# EAGLE board RFM69Pi_V3 (EAGLE 7.2.0)
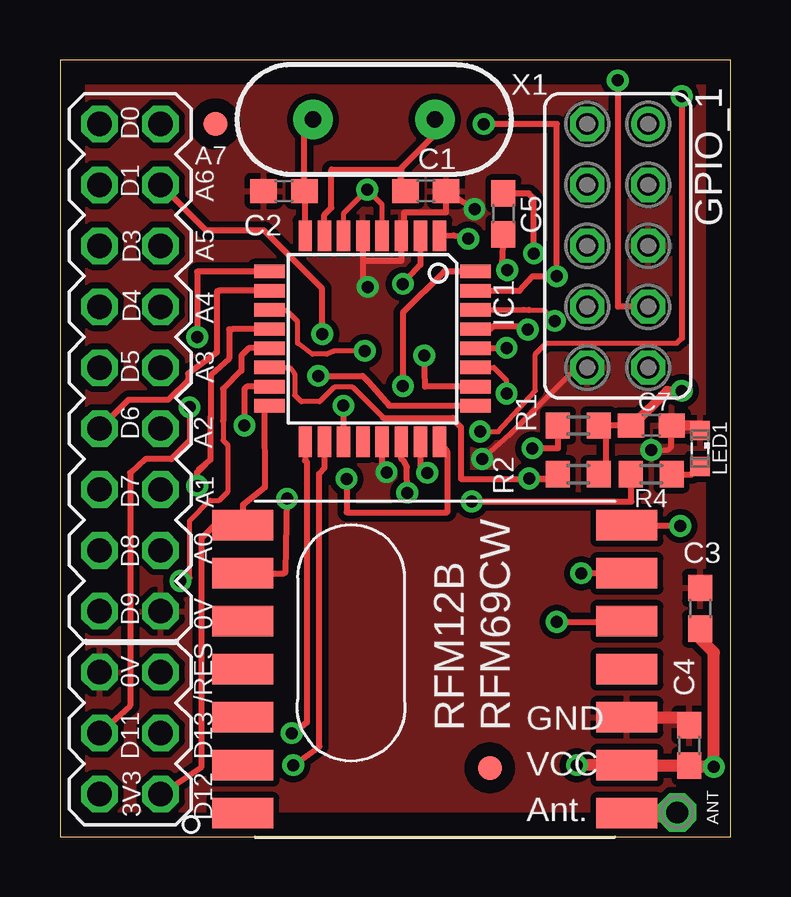
[diagram p0: board, top side]
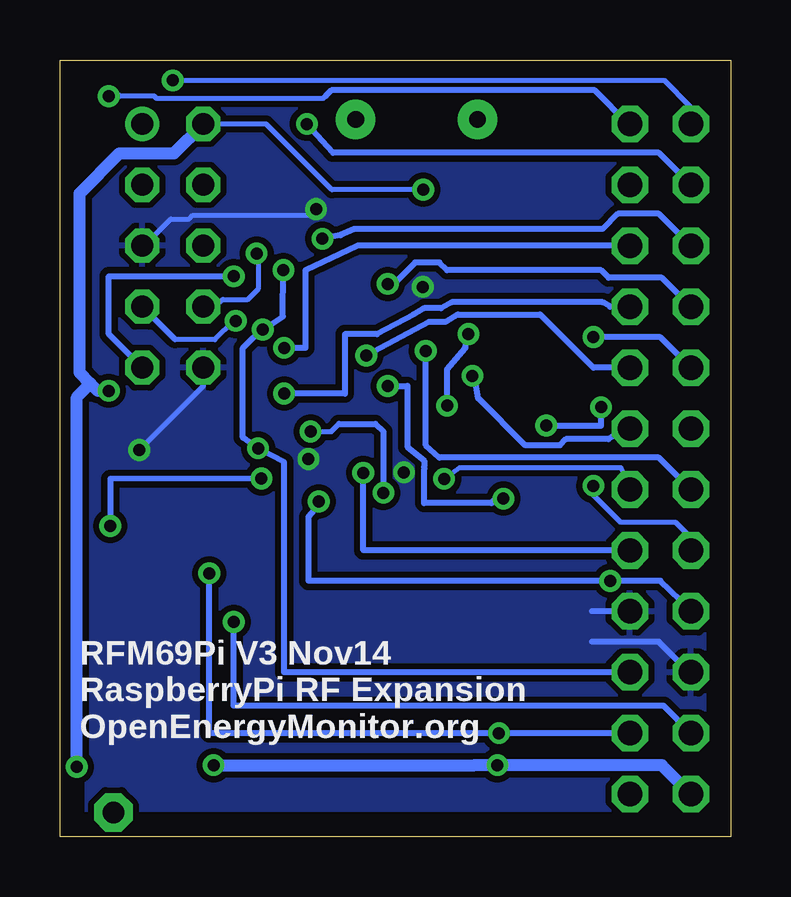
[diagram p1: board, bottom side, seen from below]

Size 27.94 x 32.38 mm. Coordinates in mm from the lower left corner, seen from the top.
Outline: 0,0 27.94,0 27.94,32.38 0,32.38 0,0
Copper layers (1*16): Top 0.035mm / dielectric 1.5mm / Bottom 0.035mm
Design rules "default *": minimum track width 10mil, minimum drill 19mil, track to track 6mil, track to pad 6mil, pad to pad 6mil, via to via 6mil, smd to smd 6mil, copper to edge 40mil, drill to drill 8mil, minimum pad ring 10mil, minimum via ring 8mil, stop-mask expansion 4mil, vias tented up to drill 0.6mm, thermal gap 10mil
Net classes: 0 default: width 0.203 mm, drill 0.203 mm, clearance 0.203 mm; 1 power: width 0.254 mm, drill 0.254 mm, clearance 0.254 mm

## Footprints (pad centres in the part's own frame; a part is rotated, then mirrored left to right if it is on the bottom)
1,6/0,8 = drill 0.9 pad 1.6 octagon: 1 0,0
C0603 = smd 1.1 x 1: 1 -0.85,0; 2 0.85,0
FE05-2 = drill 0.914: 1 -5.08,1.27 | drill 0.914 octagon: 2 -5.08,-1.27; 3 -2.54,1.27; 4 -2.54,-1.27; 5 0,1.27; 6 0,-1.27; 7 2.54,1.27; 8 2.54,-1.27; 9 5.08,1.27; 10 5.08,-1.27
TQFP32-08 = smd 1.27 x 0.559: 1 -4.293,2.8; 2 -4.293,2; 3 -4.293,1.2; 4 -4.293,0.4; 5 -4.293,-0.4; 6 -4.293,-1.2; 7 -4.293,-2; 8 -4.293,-2.8; 17 4.293,-2.8; 18 4.293,-2; 19 4.293,-1.2; 20 4.293,-0.4; 21 4.293,0.4; 22 4.293,1.2; 23 4.293,2; 24 4.293,2.8 | smd 0.559 x 1.27: 9 -2.8,-4.293; 10 -2,-4.293; 11 -1.2,-4.293; 12 -0.4,-4.293; 13 0.4,-4.293; 14 1.2,-4.293; 15 2,-4.293; 16 2.8,-4.293; 25 2.8,4.293; 26 2,4.293; 27 1.2,4.293; 28 0.4,4.293; 29 -0.4,4.293; 30 -1.2,4.293; 31 -2,4.293; 32 -2.8,4.293
SML0603 = smd 0.8 x 0.8: A 0.75,0; C -0.75,0
MA12-2 = drill 1.016 octagon: 1 -13.97,-1.27; 2 -13.97,1.27; 3 -11.43,-1.27; 4 -11.43,1.27; 5 -8.89,-1.27; 6 -8.89,1.27; 7 -6.35,-1.27; 8 -6.35,1.27; 9 -3.81,-1.27; 10 -3.81,1.27; 11 -1.27,-1.27; 12 -1.27,1.27; 13 1.27,-1.27; 14 1.27,1.27; 15 3.81,-1.27; 16 3.81,1.27; 17 6.35,-1.27; 18 6.35,1.27; 19 8.89,-1.27; 20 8.89,1.27; 21 11.43,-1.27; 22 11.43,1.27; 23 13.97,-1.27; 24 13.97,1.27
R0603 = smd 1 x 1.1: 1 -0.85,0; 2 0.85,0
RFM12B = smd 2.54 x 1.27: ANT 8,-6; FFS -8,2; GND 8,-2; IRQ -8,4; P$8 -8,0; P$9 -8,-2; P$10 -8,-4; P$12 -8,-6; P$16 8,0; SCK 8,4; SDI 8,2; SDO -8,6; SEL 8,6; VDD 8,-4
FIDUCIAL_1MM = smd 1 x 1: 1 0,0
HC49US = drill 0.7 pad 1.651: 1 -2.54,0; 2 2.54,0

## Placement (x,y rotation side)
ANT  [1,6/0,8]  25.72,1.02 0 top
C1  22pF  [C0603]  15.24,26.92 0 top
C2  22pF  [C0603]  9.33,26.92 180 top
C3  10uF  [C0603]  26.67,9.53 270 top
C4  0.1uF  [C0603]  26.23,3.81 90 top
C5  0.1uF  [C0603]  18.48,25.97 270 top
C7  0.1uF  [C0603]  24.64,17.14 0 top
GPIO_1  [FE05-2]  23.24,24.64 270 top
IC1  ATMEGA168  [TQFP32-08]  13.02,20.76 270 top
LED1  [SML0603]  26.67,16.19 270 top
PL2  [MA12-2]  2.92,15.75 90 top
R1  10K  [R0603]  21.59,17.14 0 top
R2  10K  [R0603]  21.59,15.11 0 top
R4  220R  [R0603]  24.64,15.11 180 top
RFM12B-RFM69CW  RFM12B  [RFM12B]  15.62,6.99 0 top
U$1  FIDUCIAL  [FIDUCIAL_1MM]  17.91,2.87 0 top
U$2  FIDUCIAL  [FIDUCIAL_1MM]  6.48,29.72 0 top
X1  [HC49US]  13.08,29.91 0 top

## Library data of the parts
ANT RFM12B-RFM69CW = JeeLabs
C1-C5 = rcl
C7 = resistor
GPIO_1 = con-lsta; OC_FARNELL: unknown; OC_NEWARK: unknown
IC1 X1 = SparkFun
LED1 = led
PL2 = con-lstb; OC_FARNELL: unknown; OC_NEWARK: unknown
R1 R2 R4 U$1 U$2 = adafruit

## Nets
+3V3 [power]: C3.2 C4.1 C7.1 GPIO_1.2 IC1.4 IC1.6 IC1.18 PL2.2 R1.2 R2.2 RFM12B-RFM69CW.VDD
_RESET: C5.1 GPIO_1.8
A0: IC1.23 PL2.9
A1: IC1.24 PL2.11
A2: IC1.25 PL2.13
A3: IC1.26 PL2.15
A4/SDA: IC1.27 PL2.17
A5/SCL: IC1.28 PL2.19
A6: IC1.19 PL2.21
A7: IC1.22 PL2.23
D0/RX: GPIO_1.7 IC1.30 PL2.24
D1/TX: GPIO_1.9 IC1.31 PL2.22
D2: IC1.32 RFM12B-RFM69CW.IRQ
D3: IC1.1 PL2.20
D4: IC1.2 PL2.18
D5: IC1.9 PL2.16
D6: IC1.10 PL2.14
D7: IC1.11 PL2.12
D8: IC1.12 PL2.10
D9: IC1.13 PL2.8 R4.2
D10: IC1.14 R2.1 RFM12B-RFM69CW.SEL
D11/MOSI: IC1.15 PL2.4 RFM12B-RFM69CW.SDI
D12/MISO: IC1.16 PL2.1 RFM12B-RFM69CW.SDO
D13/SCK: IC1.17 PL2.3 RFM12B-RFM69CW.SCK
GND [power]: C1.2 C2.2 C3.1 C4.2 C7.2 GPIO_1.5 GPIO_1.10 IC1.3 IC1.5 IC1.21 LED1.C PL2.6 PL2.7 RFM12B-RFM69CW.GND
N$1: C1.1 IC1.7 X1.2
N$2: C2.1 IC1.8 X1.1
N$3: LED1.A R4.1
N$6 [power]: ANT.1 RFM12B-RFM69CW.ANT
RESET: C5.2 IC1.29 PL2.5 R1.1

## Tracks (layer width: path | path; a pad name or v marks a point on that pad's centre or on a via)
+3V3  (via drill 0.5)
  Top 0.203: IC1.6 11.82,25.99 v12.8,26.98 13.41,26.36 IC1.4
  Top 0.254: 23.65,2.96 RFM12B-RFM69CW.VDD 23.42,3 | 22.73,17.14 R1.2 22.42,17.14 | 23.37,17.14 C7.1 22.73,17.14 | 26.27,2.92 C4.1 | v9.72,2.98 10.81,3.76 10.79,3.79 10.79,15.14 11.02,15.39 11.02,16.46 IC1.18 10.99,16.5 | 22.73,17.14 22.73,15.01 R2.2
  Top 0.406: C7.1 23.85,17.14 25.3,18.59 v25.91,18.59
  Top 0.508: C4.1 23.65,2.96 | 26.27,2.92 v27.24,2.92 27.24,7.68 26.67,8.26 C3.2 | 23.42,3 v21.54,2.98
  Bottom 0.203: v12.8,26.98 16.61,26.98 19.36,29.72 GPIO_1.2
  Bottom 0.254: v9.72,2.98 10.67,2.98
  Bottom 0.508: PL2.2 2.86,2.98 10.67,2.98 v21.54,2.98 | v25.91,18.59 26.36,18.59 26.67,18.9 | 26.67,18.9 27.13,19.36 27.13,26.82 25.45,28.5 23.19,28.5 GPIO_1.2 | v27.24,2.92 27.24,18.33 26.67,18.9
_RESET  (via drill 0.5)
  Top 0.254: v19.75,24.32 19.75,26.61 19.53,26.82 C5.1
  Bottom 0.203: GPIO_1.8 21.46,22.1 21.16,22.4 20.12,22.4 19.66,22.86 19.66,24.23 v19.75,24.32
A0  (via drill 0.5)
  Top 0.254: IC1.23 15.02,15.4 v15.3,15.18
  Bottom 0.254: PL2.9 15.3,11.94 v15.3,15.18
A1  (via drill 0.5)
  Top 0.254: v11.94,14.92 11.94,13.53 16.13,13.53 16.14,16.07 IC1.24
  Bottom 0.203: PL2.11 4.19,14.8 4.57,15.38 11.3,15.38 v11.94,14.92
A2  (via drill 0.5)
  Top 0.254: IC1.25 13.72,17.97 12.87,18.95 12.61,19.21 v10.76,19.21
  Bottom 0.254: PL2.13 4.51,17.02 4.89,16.7 5.08,16.57 6.86,16.57 7.11,16.32 8.55,16.32 10.52,18.29 10.67,19.13 v10.76,19.21
A3  (via drill 0.5)
  Top 0.254: IC1.26 15.21,18.77 v15.18,20.07
  Bottom 0.254: PL2.15 5.71,19.56 7.94,21.78 11.37,21.78 11.87,21.46 12.57,21.46 v15.18,20.07
A4/SDA  (via drill 0.5)
  Top 0.203: IC1.27 18.08,19.56 18.59,19.05 18.59,18.49 v18.61,18.48
  Bottom 0.254: PL2.17 5.02,22.1 5.33,22.29 11.62,22.29 12.06,22.04 12.76,22.04 13.21,21.78 14.73,20.95 16.07,20.95 16.07,18.48 v18.61,18.48
A5/SCL  (via drill 0.5)
  Top 0.254: IC1.28 18.59,20.36 v18.61,20.38
  Bottom 0.254: PL2.19 15.56,24.64 17.72,23.62 17.72,20.38 v18.61,20.38
A6  (via drill 0.5)
  Top 0.254: IC1.19 11.82,17.52 v11.81,17.97 | PL2.21 6.1,25.27 8.51,25.27 10.92,22.86 v10.92,20.95
  Bottom 0.254: v11.81,17.97 11.81,19.49 11.05,20.38 v10.92,20.95
A7  (via drill 0.5)
  Top 0.203: v17.5,16.89 18.26,16.89 19.81,18.59 19.81,20.12 20.27,20.57 25.69,20.57 25.91,20.79
  Top 0.254: v14.46,14.34 14.45,15.4 14.33,15.66 14.22,15.75 14.22,16.46 IC1.22 | v25.91,30.87 25.91,20.79
  Bottom 0.203: 25.45,30.89 24.03,30.89 23.93,30.79 16.97,30.79 16.87,30.89 | 16.32,17.21 16.64,16.89 v17.5,16.89 17.72,16.89
  Bottom 0.254: PL2.23 4.25,29.72 5.65,31.11 16.64,31.11 16.87,30.89 | v14.46,14.34 14.46,16.89 14.8,17.21 16.32,17.21 | 25.45,30.89 v25.91,30.87
D0/RX  (via drill 0.5)
  Top 0.203: 19.55,21.96 20.16,21.96 v20.62,21.51
  Top 0.254: IC1.30 19.3,21.97 19.55,21.96 | v23.24,31.53 23.24,22.1 GPIO_1.7
  Bottom 0.203: v20.62,21.51 20.71,21.51 21.49,20.73 23.14,20.73 23.18,20.77 | v23.24,31.53 2.77,31.53 1.65,30.41 PL2.24
  Bottom 0.254: 23.18,20.77 GPIO_1.7
D1/TX  (via drill 0.5)
  Top 0.254: IC1.31 19.14,22.77 19.68,23.37 v20.7,23.37 20.7,29.72 v17.65,29.72
  Bottom 0.254: PL2.22 2.98,28.51 16.57,28.51 v17.65,29.72 | GPIO_1.9 25.91,20.95 25.91,23.37 v20.7,23.37
D2  (via drill 0.5)
  Top 0.254: RFM12B-RFM69CW.IRQ 9.33,10.98 9.4,11.05 v9.46,14.1 | IC1.32 16.01,23.56 14.29,21.84 v14.29,18.8
  Bottom 0.254: v9.46,14.1 9.78,14.1 9.97,13.91 12.76,13.91 12.76,15.3 12.75,15.34 12.76,15.43 12.76,15.68 13.46,16.26 13.46,18.8 v14.29,18.8
D3  (via drill 0.5)
  Top 0.254: IC1.1 16.39,25.08 v17,24.93
  Bottom 0.254: PL2.20 2.98,25.97 4.7,25.97 5.33,25.34 15.68,25.34 16.26,25.08 v17,24.93
D4  (via drill 0.5)
  Top 0.254: IC1.2 15.02,23.84 v14.29,23.05
  Bottom 0.254: PL2.18 2.86,23.3 5.08,23.3 5.4,23.62 11.81,23.62 12.13,23.94 13.14,23.94 14.03,23.05 v14.29,23.05
D5  (via drill 0.5)
  Top 0.254: IC1.9 6.79,23.56 5.71,23.56 v5.71,20.83
  Bottom 0.254: PL2.16 2.92,20.83 v5.71,20.83
D6
  Top 0.254: PL2.14 2.86,18.22 4.51,18.22 5.33,19.05 5.33,19.3 6.54,20.19 6.54,22.73 6.64,22.77 IC1.10
D7  (via drill 0.5)
  Top 0.203: v12.7,20.26 11.42,20.26 11.12,20.12 10.52,20.12 9.91,20.57 9.91,21.49 9.45,21.95 8.74,21.95 IC1.11
  Bottom 0.254: PL2.12 2.98,15.81 12.13,15.81 12.7,16.32 v12.7,20.26
D8  (via drill 0.5)
  Top 0.203: 6.27,17.5 6.29,17.44
  Top 0.254: IC1.12 7.19,21.16 7.05,21.14 7.05,19.94 6.29,19.24 6.29,17.44 | 5.79,15.32 6.07,15.55 | 6.07,15.55 6.27,15.72 6.27,17.5 | v5.71,14.63 5.71,15.2 6.07,15.55
  Bottom 0.203: PL2.10 1.65,12.47 2.29,13.11 4.57,13.11 5.71,14.25 v5.71,14.63
D9  (via drill 0.5)
  Top 0.203: 5.4,10.79 5.4,13.17 6.25,14.02 6.63,14.02 7.01,14.4 7.01,16.31 6.79,16.52 6.79,17.34
  Top 0.254: IC1.13 7.86,20.36 7.56,20.07 7.56,19.43 6.79,18.67 6.79,17.34 | v5.02,10.67 5.27,10.67 5.4,10.79 | v17.16,13.98 17.2,13.98 17.46,13.97 23.81,13.97 23.79,13.99 R4.2
  Bottom 0.254: PL2.8 1.65,9.46 2.92,10.67 v5.02,10.67 17.59,10.67 17.59,13.34 17.22,13.77 v17.16,13.98
D10  (via drill 0.5)
  Top 0.203: IC1.14 9.59,19.56 9.77,19.31 9.78,18.41 10.06,18.14 10.82,18.14 11.43,18.75 12.19,18.75 13.46,17.48 13.46,17.46
  Top 0.254: 13.46,17.46 16.38,17.46 16.38,17.4 16.7,17.08 16.7,14.92 20.43,14.92 v19.55,14.94 20.57,14.92 R2.1 | 23.44,13.2 RFM12B-RFM69CW.SEL 25.81,12.98 v25.84,12.95
  Bottom 0.254: v19.55,14.94 25.84,14.92 v25.84,12.95
D11/MOSI  (via drill 0.5)
  Top 0.254: v20.7,8.95 23.59,8.95 RFM12B-RFM69CW.SDI | IC1.15 7.78,18.77 7.68,18.67 v7.68,17.14 | v5.4,17.91 5.4,16.51 4.64,15.75 3.56,15.75 2.92,15.18 2.92,5.46 PL2.4
  Bottom 0.254: PL2.4 2.79,5.46 20.7,5.46 v20.7,8.95 | v7.68,17.14 5.4,17.14 v5.4,17.91
D12/MISO
  Top 0.254: PL2.1 5.91,2.92 5.91,12.46 6.4,12.95 7.59,12.95 RFM12B-RFM69CW.SDO 7.62,13.84 8.53,14.57 8.51,17.78 8.72,17.93 IC1.16
D13/SCK  (via drill 0.5)
  Top 0.254: RFM12B-RFM69CW.SCK v21.72,10.98 v21.72,10.99 | IC1.17 10.22,15.68 10.29,15.62 10.29,4.76 9.72,4.32 v9.65,4.32
  Bottom 0.254: v21.72,10.99 21.72,4.32 v9.65,4.32 PL2.3
GND  (via drill 0.5)
  Top 0.203: v24.64,16.13 25.34,16.13 25.46,16.26 | GPIO_1.10 21.54,19.56 18.75,16.76 17.54,15.7 v17.59,15.75
  Top 0.254: C4.2 26.23,4.95 | 23.65,4.95 RFM12B-RFM69CW.GND | 25.46,16.26 25.46,16.32 C7.2 | v17.27,26.16 C1.2 16.09,26.04 14.35,26.04 14.35,25.06 IC1.3 14.22,24.07 14.22,24 12.64,24 12.64,24.98 IC1.5 12.62,23.13 v12.83,22.92 | IC1.21 13.4,15.37 13.57,15.2 v13.61,15.2
  Top 0.406: RFM12B-RFM69CW.GND 26.16,4.99 | 26.73,17.14 C7.2
  Top 0.508: 26.23,4.95 23.65,4.95
  Bottom 0.203: 21.97,18.8 v24.64,16.13 | GPIO_1.5 24.43,24.64 23.32,25.76 22.55,25.76 22.4,25.91 17.53,25.91 v17.27,26.16
  Bottom 0.254: PL2.6 1.71,6.86 2.98,8.13 5.78,8.13 | PL2.7 5.78,9.4 | v12.83,22.92 12.83,22.61 | v13.61,15.2 13.4,15.3
  pour Top: -0.13,32.51 27.94,32.51 27.94,-0.06 -0.13,-0.06
  pour Bottom: 0,32.38 27.88,32.38 27.88,0 0,0
N$1
  Top 0.254: IC1.7 11.02,25.94 11.3,26.23 11.3,27.81 14.22,27.81 14.2,27.46 | 14.2,27.46 14.2,27.85 15.62,29.27 X1.2 | C1.1 14.2,26.86 14.2,27.46
N$2
  Top 0.254: IC1.8 10.22,26.64 C2.1 10.18,29.55 X1.1
N$3
  Top 0.254: R4.1 26.34,15.11 LED1.A
N$6
  Top 0.254: 25.68,0.98 ANT.1
  Top 0.762: RFM12B-RFM69CW.ANT 25.68,0.98
RESET  (via drill 0.5)
  Top 0.254: v19.49,21.14 19.37,21.27 18.03,21.27 17.91,21.14 17.33,21.14 IC1.29 | v18.63,23.62 18.43,23.82 18.49,25.09 C5.2 | R1.1 20.74,16.19 v19.68,16.19 19.94,16.19
  Bottom 0.254: PL2.5 18.61,6.86 18.61,15.62 v19.68,16.19 20.32,16.64 20.32,20.38 19.94,20.77 v19.49,21.14 19.36,21.23 18.66,21.69 v18.63,23.62

## Text on the board
tNames: D0 | A7 | D1 | A6 | D3 | A5 | D4 | A4 | D5 | A3 | D6 | A2 | D7 | A1 | D8 | A0 | D9 | 0V | 0V | /RES | RFM12B / RFM69CW | D11 | D13 | 3V3 | D12
bNames: RFM69Pi V3 Nov14 / RaspberryPi RF Expansion / OpenEnergyMonitor.org